# EAGLE board pi_day_2025 (EAGLE 9.6.2)
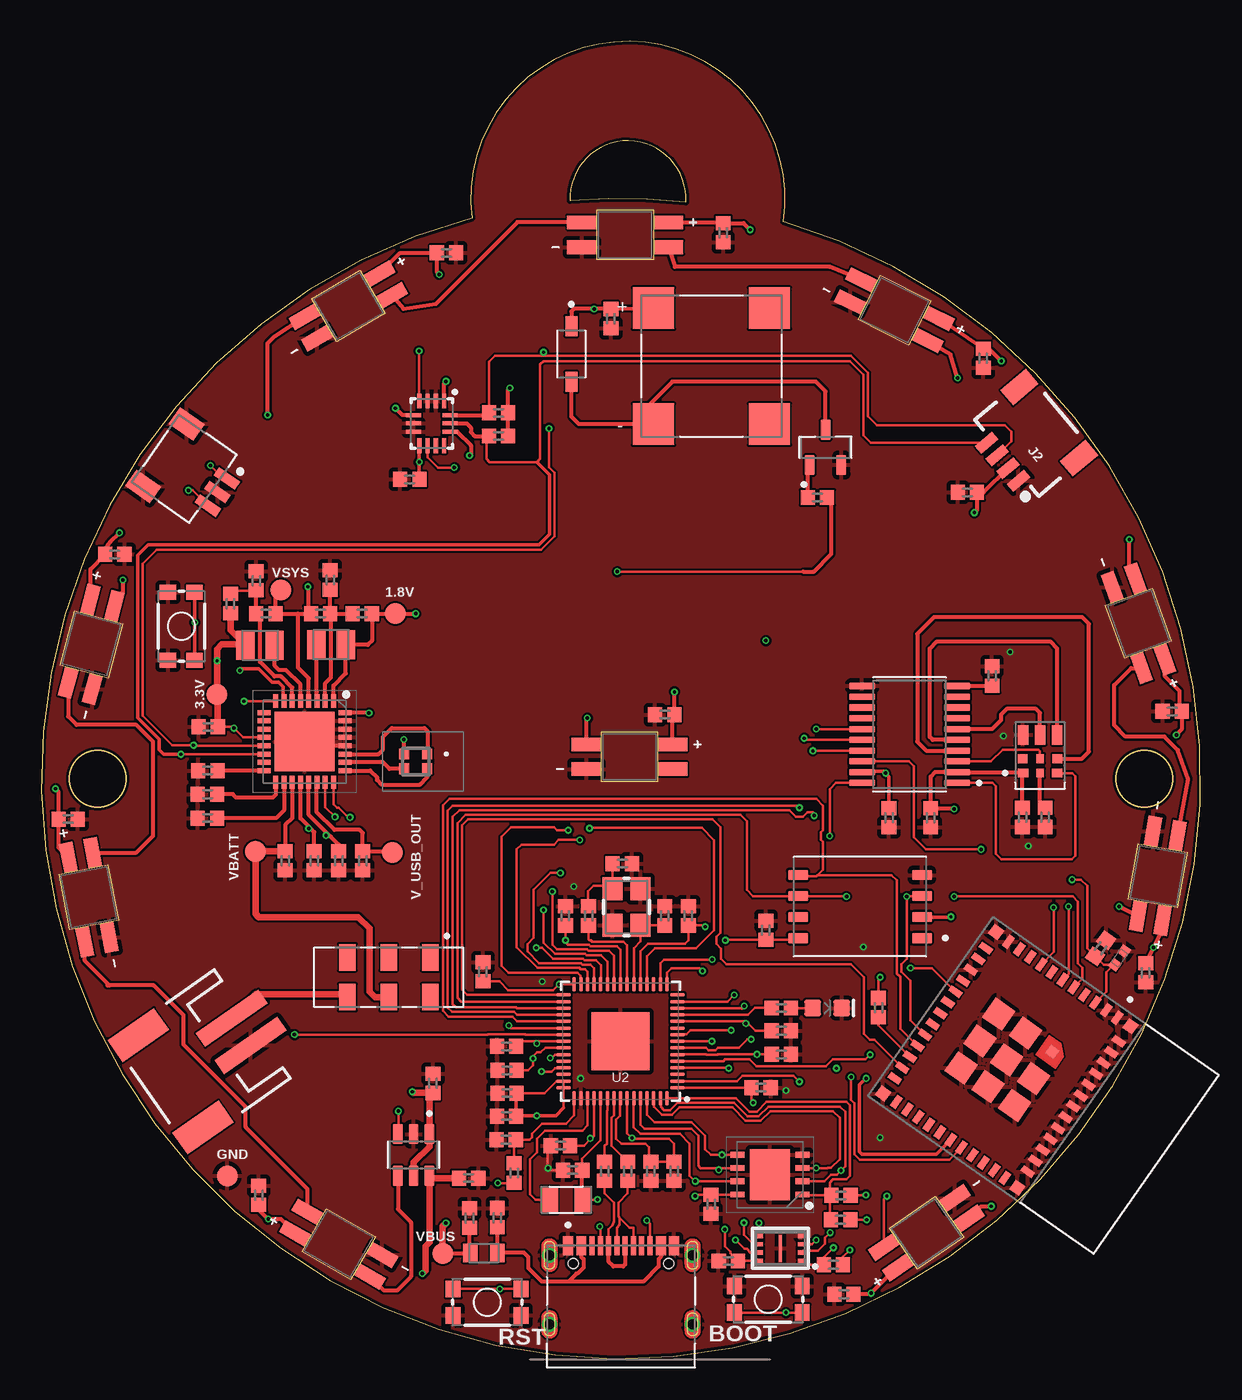
[diagram p0: board, top side]
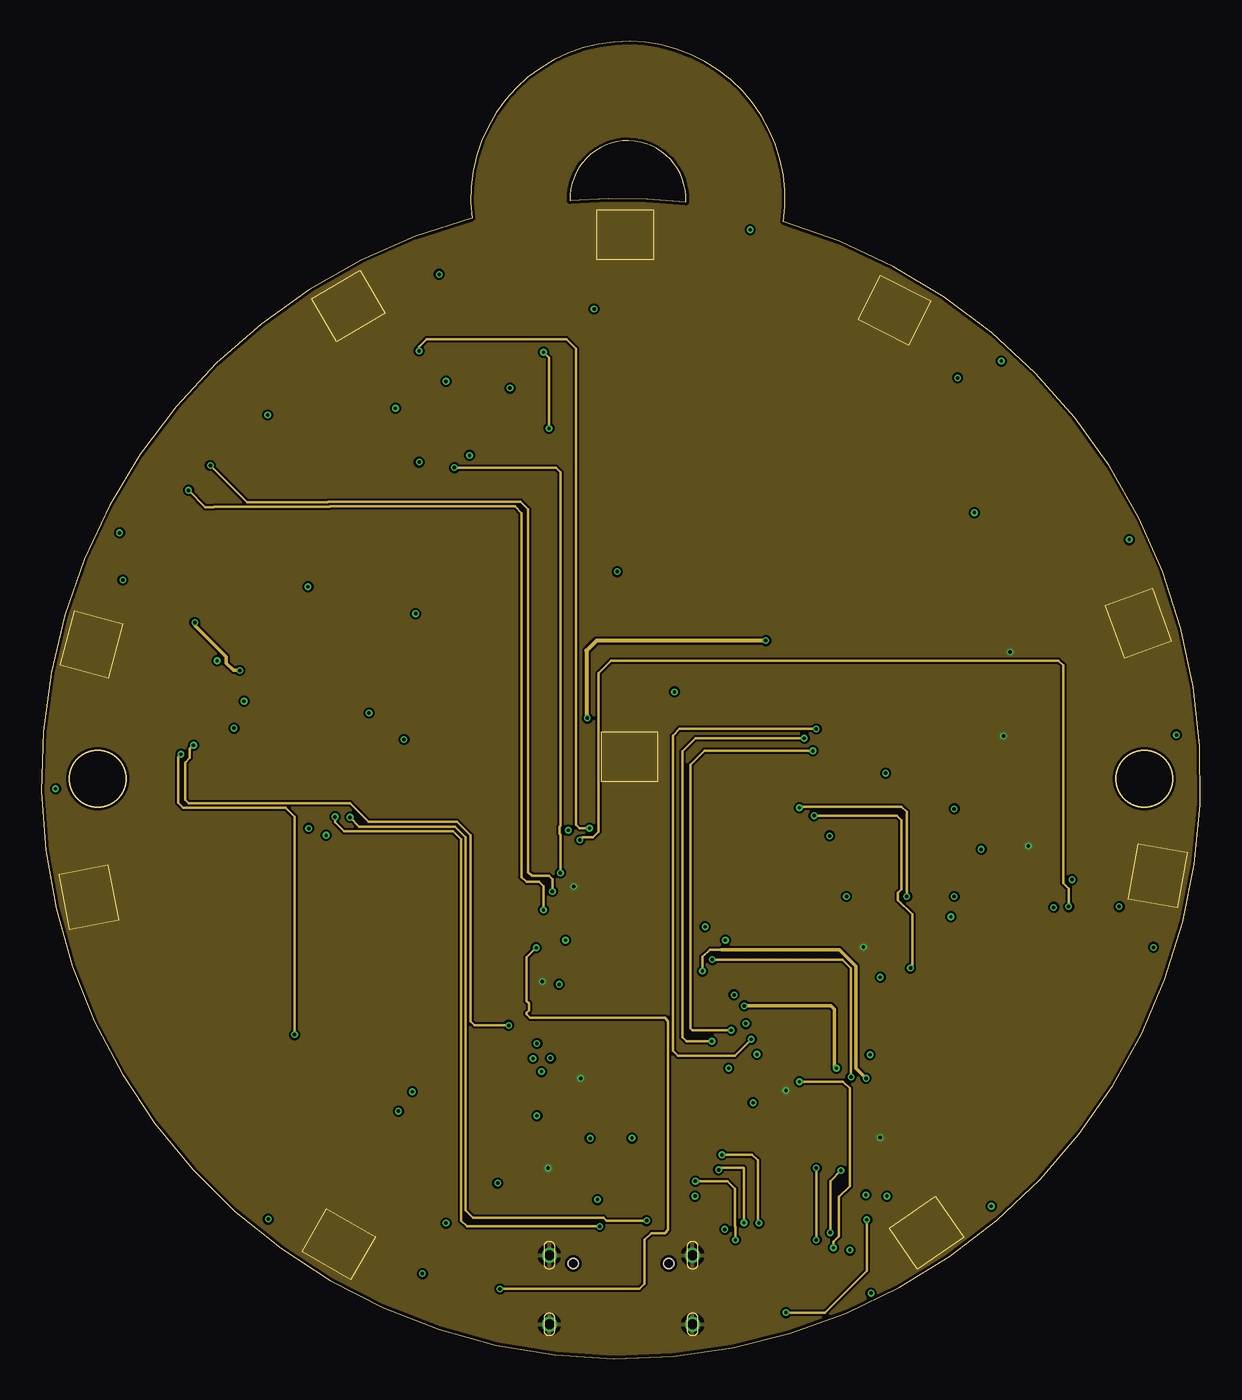
[diagram p1: board, inner layer Route2]
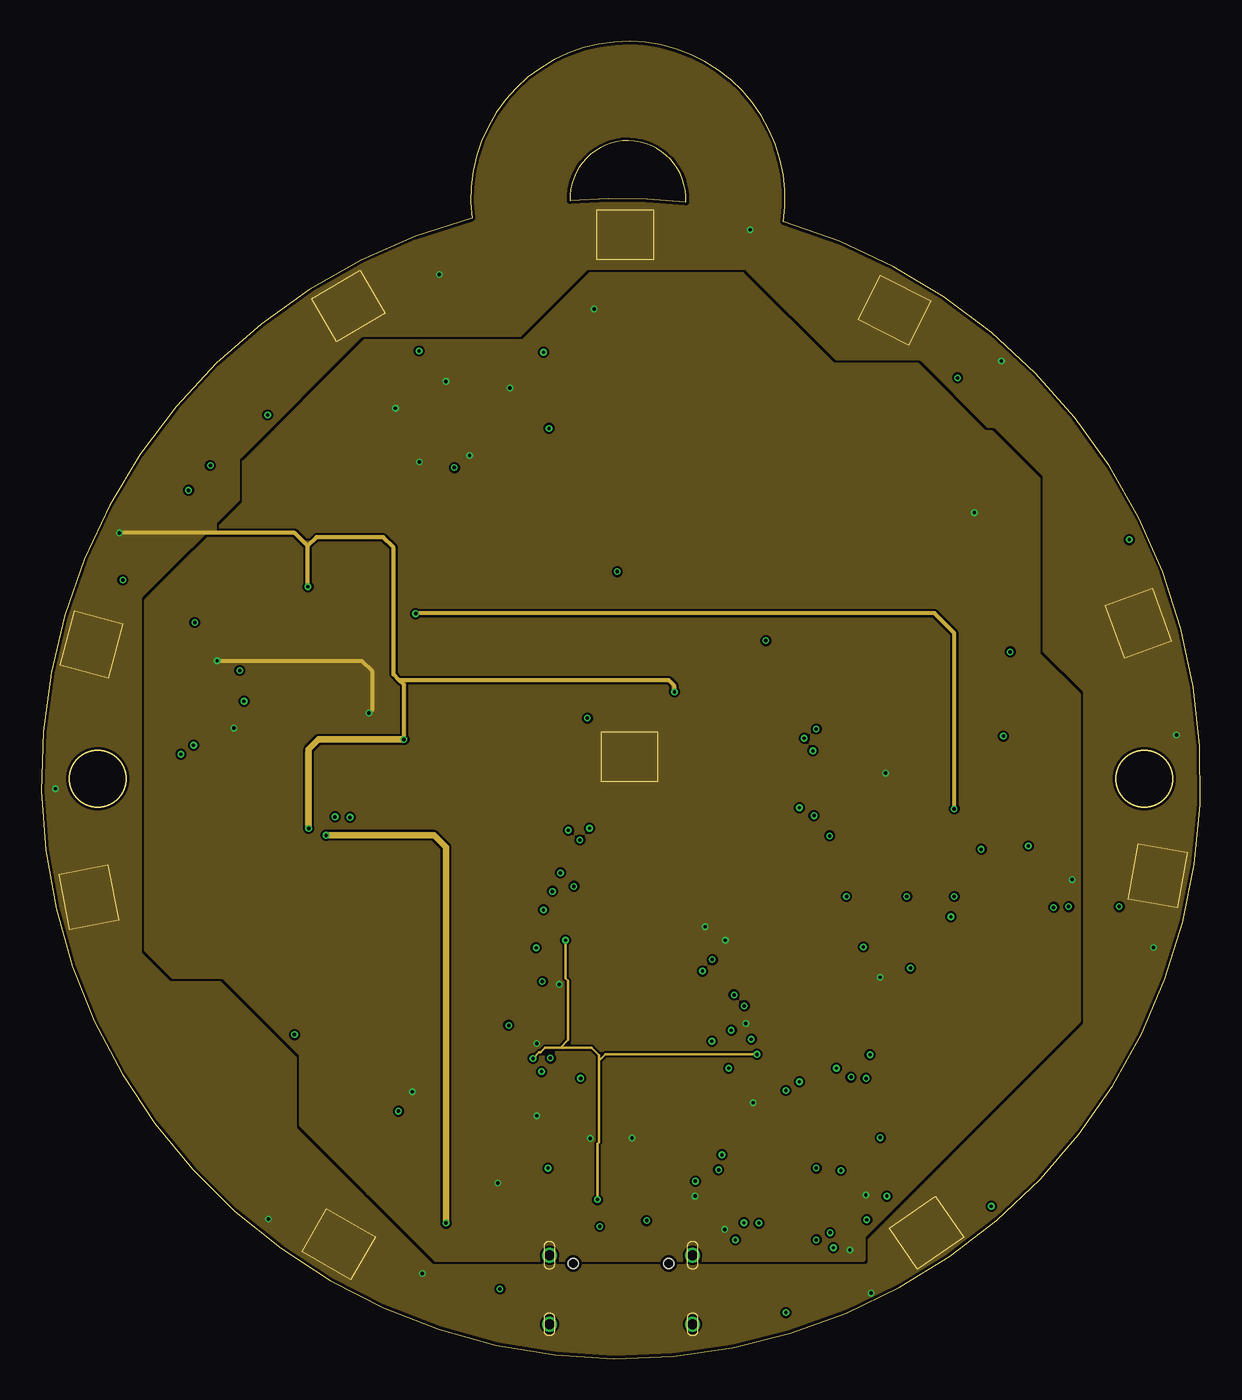
[diagram p2: board, inner layer Route15]
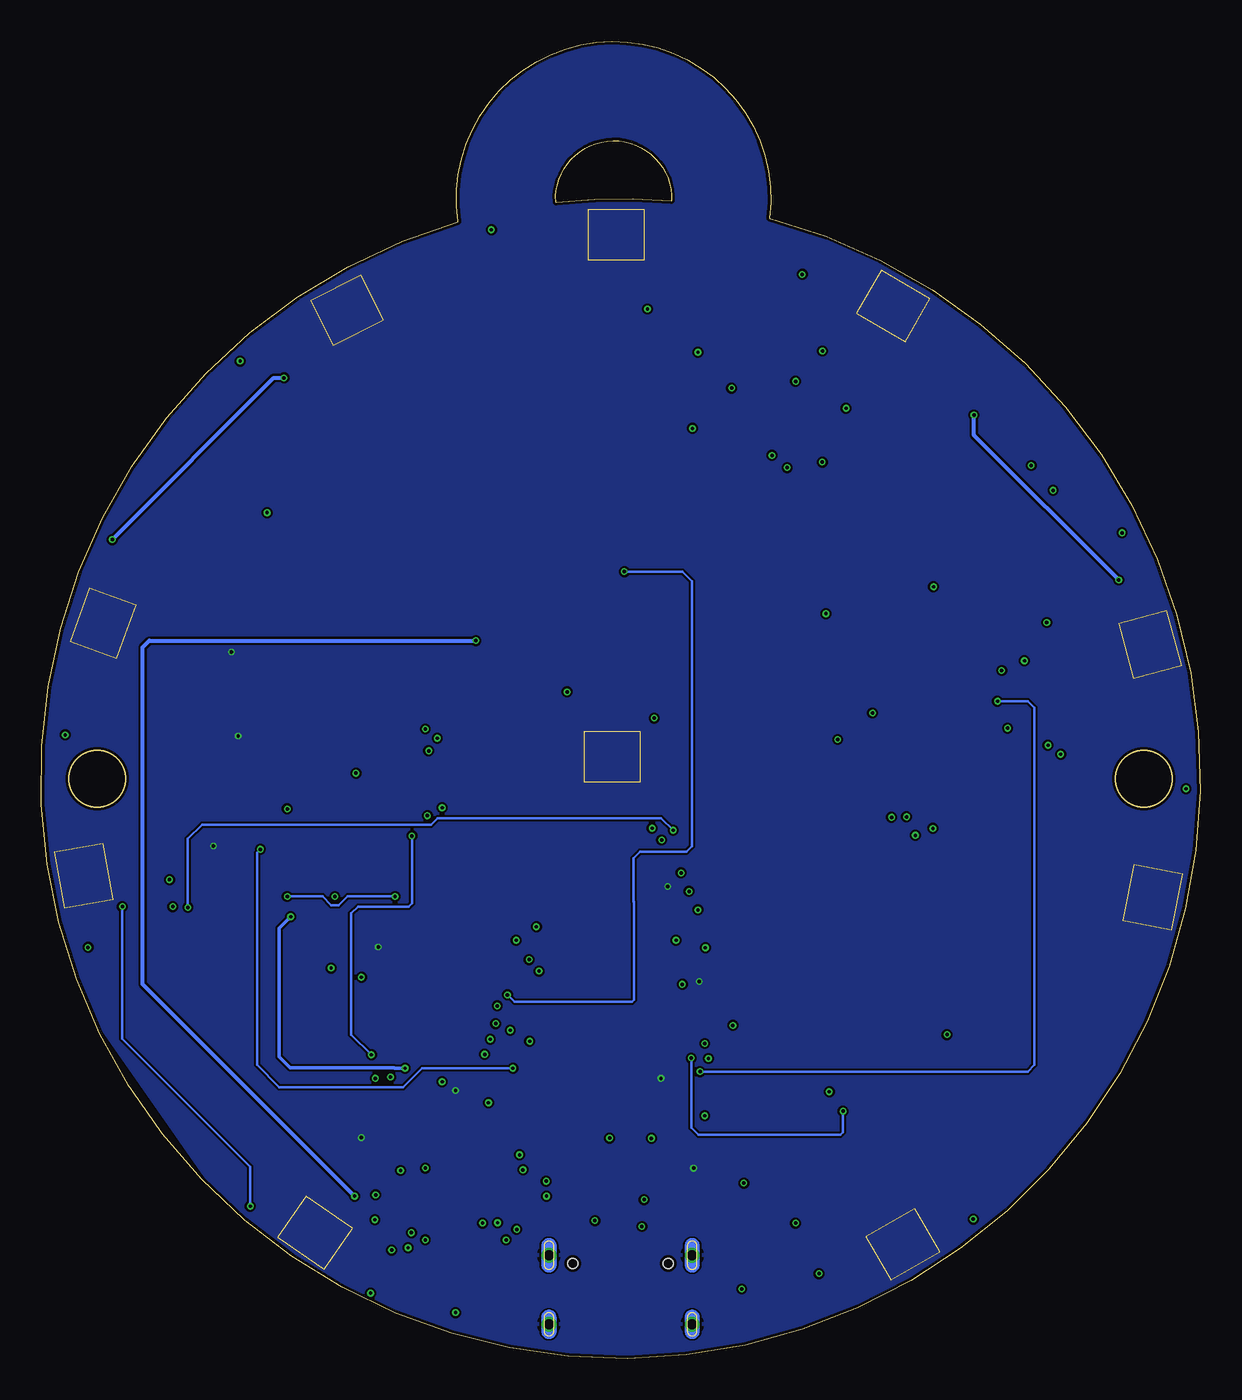
[diagram p3: board, bottom side, seen from below]

Size 69.96 x 79.49 mm. Coordinates in mm from the lower left corner, seen from the top.
Outline: 38.9,69.78 arc186 31.91,69.86 arc-11 38.9,69.78
Outline: 25.99,68.82 arc329 44.8,68.6 arc196 25.99,68.82
Outline: circle at 3.41,35 radius 1.7
Outline: circle at 66.59,35 radius 1.7
Copper layers (1+2*15+16): Top 0.035mm / dielectric 0.2mm / Route2 0.0175mm / dielectric 1.065mm / Route15 0.0175mm / dielectric 0.2mm / Bottom 0.035mm
Design rules "jlcpcb-4layers *": minimum track width 3.5mil, minimum drill 0.2mm, track to track 5mil, track to pad 0.2mm, pad to pad 5mil, via to via 0.5mm, smd to smd 5mil, copper to edge 0.2mm, drill to drill 6mil, minimum pad ring 4mil, minimum via ring 4mil, stop-mask expansion 0.05mm, vias tented up to drill 16mil, thermal gap 10mil

## Footprints (pad centres in the part's own frame; a part is rotated, then mirrored left to right if it is on the bottom)
B1,27 = smd 1.27 x 1.27: TP 0,0
0402 = smd 0.85 x 0.9: 1 -0.58,0; 2 0.58,0
0402-TIGHT = smd 0.6 x 0.6: 1 -0.5,0; 2 0.5,0
HRO_TYPE-C-31-M-12 = smd 0.6 x 1.14: A1_B12 -3.2,4.75; A4_B9 -2.4,4.75; B1_A12 3.2,4.75; B4_A9 2.4,4.75 | smd 0.3 x 1.14: A5 -1.25,4.75; A6 -0.25,4.75; A7 0.25,4.75; A8 1.25,4.75; B5 1.75,4.75; B6 0.75,4.75; B7 -0.75,4.75; B8 -1.75,4.75 | drill 0.6 pad 0.9: S1 -4.325,4.17; S2 4.325,4.17; S3 -4.325,0; S4 4.325,0 | hole 0.6: -2.89,3.68; 2.89,3.68
LED_SK6812-E = smd 1.8 x 0.82: 1 2.6,0.75; 2 2.6,-0.75; 3 -2.6,-0.75; 4 -2.6,0.75
LED-0603 = smd 1 x 1: A -0.877,0; C 0.877,0
SOD3715X145N = smd 1.21 x 0.73: A 1.68,0; C -1.68,0
SON80P400X400X50-9N = smd 0.85 x 0.35: 1 -1.95,1.2; 2 -1.95,0.4; 3 -1.95,-0.4; 4 -1.95,-1.2; 5 1.95,-1.2; 6 1.95,-0.4; 7 1.95,0.4; 8 1.95,1.2 | smd 2.4 x 3.1: 9 0,0
QFN50P500X500X90-33N = smd 0.8 x 0.3: 1 -2.45,1.75; 2 -2.45,1.25; 3 -2.45,0.75; 4 -2.45,0.25; 5 -2.45,-0.25; 6 -2.45,-0.75; 7 -2.45,-1.25; 8 -2.45,-1.75; 17 2.45,-1.75; 18 2.45,-1.25; 19 2.45,-0.75; 20 2.45,-0.25; 21 2.45,0.25; 22 2.45,0.75; 23 2.45,1.25; 24 2.45,1.75 | smd 0.3 x 0.8: 9 -1.75,-2.45; 10 -1.25,-2.45; 11 -0.75,-2.45; 12 -0.25,-2.45; 13 0.25,-2.45; 14 0.75,-2.45; 15 1.25,-2.45; 16 1.75,-2.45; 25 1.75,2.45; 26 1.25,2.45; 27 0.75,2.45; 28 0.25,2.45; 29 -0.25,2.45; 30 -0.75,2.45; 31 -1.25,2.45; 32 -1.75,2.45 | smd 3.6 x 3.6: 33 0,0
JST-2-SMD = smd 1 x 4.6: 1 -1,-3.7; 2 1,-3.7 | smd 1.6 x 3.4: NC1 -3.4,1.5; NC2 3.4,1.5
1X04_1MM_RA = smd 0.6 x 1.35: 1 -1.5,0; 2 -0.5,0; 3 0.5,0; 4 1.5,0 | smd 1.2 x 2: NC1 2.8,-3.675; NC2 -2.8,-3.675
JST_SM03B-SRSS-TB(LF)(SN) = smd 0.6 x 1.55: 1 -1,0; 2 0,0; 3 1,0 | smd 1.2 x 1.8: S1 -2.3,-3.875; S2 2.3,-3.875
INDC1608X100N = smd 0.89 x 1.11: 1 -0.814,0; 2 0.814,0
IND_LQH2MCN120K02L = smd 1 x 1.6: 1 -1,0; 2 1,0
INDC2016X100N = smd 1.1 x 1.77: 1 -0.885,0; 2 0.885,0
EAST1616RGYA0 = smd 0.6 x 0.65: 1 -0.7,-0.45; 2 0.7,-0.45; 3 -0.7,0.45; 4 0.7,0.45
XDCR_CMT-8504-100-SMT-TR = smd 2.5 x 2.5: 1 3.5,3.5; 2 3.5,-3.5; N -3.5,-3.5; P -3.5,3.5
MIC_SPK2611HM7H-1-6 = smd 0.61 x 0.534: 1 1.025,1.057; 3 -1.025,1.057 | smd 0.468 x 0.534: 2 0,1.057; 5 0,0.187 | smd 0.574 x 0.534: 4 1.043,0.187; 6 -1.043,0.187 | smd 0.61 x 1.18: 7 1.025,-1.24; 9 -1.025,-1.24 | smd 0.65 x 1.18: 8 0,-1.24
SOT95P240X111-3N = smd 1.23 x 0.6: 1 -1.06,0.95; 2 -1.06,-0.95; 3 1.06,0
TACTILE_SWITCH_SMD_4.6X2.8MM = smd 0.9 x 1: 1 -2.05,-0.8; 2 2.05,-0.8; 3 2.05,0.8; 4 -2.05,0.8
SW_JS202011JCQN = smd 1.6 x 1: 1 -1.2,2.5; 2 -1.2,0; 3 -1.2,-2.5; 5 1.2,2.5; 6 1.2,0; 7 1.2,-2.5
APS6404L-3SQR-ZR = smd 0.4 x 0.25: 1 -1.25,0.75; 2 -1.25,0.25; 3 -1.25,-0.25; 4 -1.25,-0.75; 5 1.25,-0.75; 6 1.25,-0.25; 7 1.25,0.25; 8 1.25,0.75 | smd 0.2 x 1.6: 9 0,0
RP2350A = smd 0.875 x 0.2: 1 -3.437,2.8; 2 -3.437,2.4; 3 -3.437,2; 4 -3.437,1.6; 5 -3.437,1.2; 6 -3.437,0.8; 7 -3.437,0.4; 8 -3.437,0; 9 -3.437,-0.4; 10 -3.437,-0.8; 11 -3.437,-1.2; 12 -3.437,-1.6; 13 -3.437,-2; 14 -3.437,-2.4; 15 -3.437,-2.8; 31 3.437,-2.8; 32 3.437,-2.4; 33 3.437,-2; 34 3.437,-1.6; 35 3.437,-1.2; 36 3.437,-0.8; 37 3.437,-0.4; 38 3.437,0; 39 3.437,0.4; 40 3.437,0.8; 41 3.437,1.2; 42 3.437,1.6; 43 3.437,2; 44 3.437,2.4; 45 3.437,2.8 | smd 0.2 x 0.875: 16 -2.8,-3.437; 17 -2.4,-3.437; 18 -2,-3.437; 19 -1.6,-3.437; 20 -1.2,-3.437; 21 -0.8,-3.437; 22 -0.4,-3.437; 23 0,-3.437; 24 0.4,-3.437; 25 0.8,-3.437; 26 1.2,-3.437; 27 1.6,-3.437; 28 2,-3.437; 29 2.4,-3.437; 30 2.8,-3.437; 46 2.8,3.437; 47 2.4,3.437; 48 2,3.437; 49 1.6,3.437; 50 1.2,3.437; 51 0.8,3.437; 52 0.4,3.437; 53 0,3.437; 54 -0.4,3.437; 55 -0.8,3.437; 56 -1.2,3.437; 57 -1.6,3.437; 58 -2,3.437; 59 -2.4,3.437; 60 -2.8,3.437 | smd 3.5 x 3.5: EPAD 0,0
SON127P600X800X95-8N = smd 1.21 x 0.62: 1 -3.745,1.905; 2 -3.745,0.635; 3 -3.745,-0.635; 4 -3.745,-1.905; 5 3.745,-1.905; 6 3.745,-0.635; 7 3.745,0.635; 8 3.745,1.905
SOP65P640X120-20N = smd 1.57 x 0.41: 1 -2.87,2.925; 2 -2.87,2.275; 3 -2.87,1.625; 4 -2.87,0.975; 5 -2.87,0.325; 6 -2.87,-0.325; 7 -2.87,-0.975; 8 -2.87,-1.625; 9 -2.87,-2.275; 10 -2.87,-2.925; 11 2.87,-2.925; 12 2.87,-2.275; 13 2.87,-1.625; 14 2.87,-0.975; 15 2.87,-0.325; 16 2.87,0.325; 17 2.87,0.975; 18 2.87,1.625; 19 2.87,2.275; 20 2.87,2.925
LGA-14-2.5X3MM = smd 0.9 x 0.25: 1 -1.35,0.75; 2 -1.35,0.25; 3 -1.35,-0.25; 4 -1.35,-0.75; 8 1.35,-0.75; 9 1.35,-0.25; 10 1.35,0.25; 11 1.35,0.75 | smd 0.25 x 0.9: 5 -0.5,-1.1; 6 0,-1.1; 7 0.5,-1.1; 12 0.5,1.1; 13 0,1.1; 14 -0.5,1.1
XCVR_ESP32-C3-MINI-1-N4 = smd 0.8 x 0.4: 1 -5.9,1.3; 2 -5.9,0.5; 3 -5.9,-0.3; 4 -5.9,-1.1; 5 -5.9,-1.9; 6 -5.9,-2.7; 7 -5.9,-3.5; 8 -5.9,-4.3; 9 -5.9,-5.1; 10 -5.9,-5.9; 11 -5.9,-6.7; 25 5.9,-6.7; 26 5.9,-5.9; 27 5.9,-5.1; 28 5.9,-4.3; 29 5.9,-3.5; 30 5.9,-2.7; 31 5.9,-1.9; 32 5.9,-1.1; 33 5.9,-0.3; 34 5.9,0.5; 35 5.9,1.3 | smd 0.4 x 0.8: 12 -4.8,-7.6; 13 -4,-7.6; 14 -3.2,-7.6; 15 -2.4,-7.6; 16 -1.6,-7.6; 17 -0.8,-7.6; 18 0,-7.6; 19 0.8,-7.6; 20 1.6,-7.6; 21 2.4,-7.6; 22 3.2,-7.6; 23 4,-7.6; 24 4.8,-7.6; 36 4.8,2.2; 37 4,2.2; 38 3.2,2.2; 39 2.4,2.2; 40 1.6,2.2; 41 0.8,2.2; 42 0,2.2; 43 -0.8,2.2; 44 -1.6,2.2; 45 -2.4,2.2; 46 -3.2,2.2; 47 -4,2.2; 48 -4.8,2.2 | smd 0.6 x 0.6: 49_1 -1.975,-0.725 | smd 1.45 x 1.45: 49_2 0,-0.725; 49_3 1.975,-0.725; 49_4 1.975,-2.7; 49_5 1.975,-4.675; 49_6 0,-4.675; 49_7 -1.975,-4.675; 49_8 -1.975,-2.7; 49_9 0,-2.7 | smd 0.7 x 0.7: 50 5.95,2.25; 51 5.95,-7.65; 52 -5.95,-7.65; 53 -5.95,2.25
SOT95P280X145-6N = smd 1.21 x 0.58: 1 -1.255,0.95; 2 -1.255,0; 3 -1.255,-0.95; 4 1.255,-0.95; 5 1.255,0; 6 1.255,0.95
CRYSTAL-SMD-3.2X2.5MM = smd 1.4 x 1.2: 1 -1.1,-0.85; 2 1.1,-0.85; 3 1.1,0.85; 4 -1.1,0.85

## Placement (x,y rotation side)
1.8V  TPB1,27  [B1,27]  21.38,44.95 0 top
3.3V  TPB1,27  [B1,27]  10.61,40.08 0 top
C1  0.1uF  [0402]  41.47,5.89 180 top
C2  0.1uF  [0402]  13.12,9.85 90 top
C3  0.1uF  [0402]  1.62,32.56 0 top
C4  0.1uF  [0402]  4.44,48.54 0 top
C5  0.1uF  [0402]  24.45,66.72 0 top
C6  0.1uF  [0402]  41.16,67.94 270 top
C7  0.1uF  [0402]  56.86,60.37 270 top
C8  0.1uF  [0402]  68.27,39.06 180 top
C9  0.1uF  [0402]  66.67,23.29 270 top
C10  0.1uF  [0402]  48.45,3.88 180 top
C11  0.1uF  [0402]  37.63,38.86 180 top
C12  0.1uF  [0402]  27.52,8.51 90 top
C13  0.1uF  [0402]  25.85,8.48 90 top
C14  1.0uF  [0402]  17.95,30.04 270 top
C15  1.0uF  [0402]  19.4,30.04 270 top
C16  0.1uF  [0402]  10.07,38.12 0 top
C17  0.1uF  [0402]  40.43,9.32 270 top
C18  0.1uF  [0402]  26.66,23.34 90 top
C19  0.1uF  [0402]  22.24,53.06 180 top
C20  2.2UF  [0402]  14.72,30.04 270 top
C21  10uF  [0402]  16.48,30.04 270 top
C22  10uF  [0402]  13.55,44.95 180 top
C23  10uF  [0402]  16.86,44.95 0 top
C24  10uF  [0402]  19.37,44.95 180 top
C25  10uF  [0402]  11.42,45.56 90 top
C26  0.1uF  [0402]  55.9,52.27 180 top
C27  0.1uF  [0402]  28.08,18.84 180 top
C28  0.1uF  [0402]  39.06,26.72 90 top
C29  0.1uF  [0402]  43.45,16.35 0 top
C30  0.1uF  [0402]  44.67,19.78 0 top
C31  0.1uF  [0402]  36.8,11.3 270 top
C32  0.1uF  [0402]  28.11,16.02 180 top
C33  0.1uF  [0402]  38.19,11.3 270 top
C34  0.1uF  [0402]  28.08,14.63 180 top
C35  4.7uF  [0402]  28.06,13.2 180 top
C36  4.7uF  [0402]  32.07,11.38 180 top
C37  4.7uF  [0402]  31.33,12.85 180 top
C38  0.1uF  [0402]  44.67,18.36 0 top
C39  4.7uF  [0402]  31.64,26.72 90 top
C40  0.1uF  [0402]  28.11,17.4 180 top
C41  15pF  [0402]  35.07,29.87 0 top
C42  15pF  [0402]  37.63,26.72 90 top
C43  1.0uF  [0402]  59.22,32.66 270 top
C44  1.0uF  [0402]  60.59,32.66 270 top
C45  0.1uF  [0402]  53.69,32.64 90 top
C46  0.1uF  [0402]  51.17,32.64 270 top
C47  10uF  [0402-TIGHT]  65.09,24.18 55 top
C48  0.1uF  [0402]  63.95,24.76 55 top
C49  0.1uF  [0402]  23.64,16.61 270 top
C50  0.1uF  [0402]  25.8,10.89 0 top
C51  0.1uF  [0402]  43.73,25.85 270 top
C52  0.1uF  [0402]  34.38,62.76 270 top
CONN1  TYPE-C-31-M-12  [HRO_TYPE-C-31-M-12]  34.99,2.07 0 top
D1  SK6812-EJ  [LED_SK6812-E]  17.95,6.91 150 top
D2  SK6812-EJ  [LED_SK6812-E]  2.86,27.83 101 top
D3  SK6812-EJ  [LED_SK6812-E]  3.01,43.1 75 top
D4  SK6812-EJ  [LED_SK6812-E]  18.53,63.52 30 top
D5  SK6812-EJ  [LED_SK6812-E]  35.25,67.81 0 top
D6  SK6812-EJ  [LED_SK6812-E]  51.5,63.27 333.5 top
D7  SK6812-EJ  [LED_SK6812-E]  66.23,44.37 290 top
D8  SK6812-EJ  [LED_SK6812-E]  67.4,29.13 260 top
D9  SK6812-EJ  [LED_SK6812-E]  53.43,7.59 214.7 top
D10  SK6812-EJ  [LED_SK6812-E]  35.5,36.32 0 top
D11  BLUE  [LED-0603]  47.44,21.15 0 top
D12  1N5819HW-7  [SOD3715X145N]  31.99,60.63 270 top
GND  TPB1,27  [B1,27]  11.22,11.02 0 top
IC1  W25Q64JVXGIQ  [SON80P400X400X50-9N]  43.98,11.1 180 top
IC2  NPM1300-QEAA-R  [QFN50P500X500X90-33N]  15.89,37.23 270 top
J1  JST-PH=2  [JST-2-SMD]  9.03,17.6 125 top
J2  Qwiic  [1X04_1MM_RA]  58.03,54.12 130 top
J4  SM03B-SRSS-TB(LF)(SN)  [JST_SM03B-SRSS-TB(LF)(SN)]  10.63,52.3 235 top
L1  2.2nH  [INDC1608X100N]  26.71,6.37 180 top
L2  3.3uH  [IND_LQH2MCN120K02L]  31.69,9.57 180 top
L3  2.2uH  [INDC2016X100N]  17.49,43.07 0 top
L4  2.2uH  [INDC2016X100N]  13.2,43.05 180 top
LED1  EAST1616RGYA0  [EAST1616RGYA0]  22.6,36.04 180 top
LS1  MLT-5020  [XDCR_CMT-8504-100-SMT-TR]  40.45,59.89 0 top
MK1  SPK2611HM7H-1-6  [MIC_SPK2611HM7H-1-6]  60.29,36.39 180 top
Q2  BSS138  [SOT95P240X111-3N]  47.34,54.99 90 top
R1  10k  [0402]  47.82,5.66 180 top
R2  100OHM  [0402]  44.67,21.15 0 top
R3  10k  [0402]  10.02,32.61 180 top
R4  DNF  [0402]  48.28,9.85 0 top
R5  1K  [0402]  48.25,8.38 0 top
R6  2.2K  [0402]  27.6,57.07 0 top
R7  2.2K  [0402]  27.6,55.67 0 top
R9  47K  [0402]  10.02,34.06 0 top
R10  470K  [0402]  10.05,35.48 0 top
R11  33  [0402]  28.54,11.2 90 top
R12  27  [0402]  35.4,11.3 90 top
R13  27  [0402]  34,11.3 90 top
R14  0  [0402]  12.97,46.94 270 top
R15  1K  [0402]  33.04,26.72 270 top
R16  0  [0402]  17.44,46.99 270 top
R22  100K  [0402]  57.39,41.2 270 top
R23  10k  [0402]  50.54,21.18 90 top
R25  10k  [0402]  46.85,51.96 0 top
S1  MOMENTARY-SWITCH-SPST-SMD-4.6X2.8MM  [TACTILE_SWITCH_SMD_4.6X2.8MM]  43.88,3.58 0 top
S2  MOMENTARY-SWITCH-SPST-SMD-4.6X2.8MM  [TACTILE_SWITCH_SMD_4.6X2.8MM]  26.91,3.4 180 top
S3  JS202011JCQN  [SW_JS202011JCQN]  20.97,23.01 270 top
S4  MOMENTARY-SWITCH-SPST-SMD-4.6X2.8MM  [TACTILE_SWITCH_SMD_4.6X2.8MM]  8.45,44.19 270 top
U1  APS6404L-3SQR-ZR  [APS6404L-3SQR-ZR]  44.62,6.65 180 top
U2  RP2350A  [RP2350A]  34.97,19.15 180 top
U3  XTSD04GLGEAG  [SON127P600X800X95-8N]  49.42,27.28 180 top
U5  TXS0108EPWRG4  [SOP65P640X120-20N]  52.42,37.66 180 top
U6  LSM6DS3TR-C  [LGA-14-2.5X3MM]  23.56,56.44 270 top
U9  ESP32-C3-MINI-1-N4  [XCVR_ESP32-C3-MINI-1-N4]  60.49,16.48 235 top
U15  SN74LVC1T45DBVRG4  [SOT95P280X145-6N]  22.47,12.29 270 top
V_USB_OUT  TPB1,27  [B1,27]  21.17,30.53 0 top
VBATT  TPB1,27  [B1,27]  12.92,30.6 0 top
VBUS  TPB1,27  [B1,27]  24.22,6.35 0 top
VSYS  TPB1,27  [B1,27]  14.47,46.38 0 top
Y1  12MHz  [CRYSTAL-SMD-3.2X2.5MM]  35.32,27.25 90 top

## Library data of the parts
1.8V 3.3V GND V_USB_OUT VBATT VBUS VSYS = testpad
C1 C17-C19 C26-C34 C38 C40 C51 = SparkFun-Capacitors_Sai; PROD_ID: CAP-14993
C2-C11 = SparkFun-Capacitors; PROD_ID: CAP-15083
C12 C13 C16 = SparkFun-Capacitors; PROD_ID: CAP-12416
C14 C15 C43 C44 = SparkFun-Capacitors; PROD_ID: CAP-12417
C20-C25 C35-C37 C39 = SparkFun-Capacitors_Sai
C41 C42 = SparkFun-Capacitors; PROD_ID: CAP-13063
C45 C46 C48-C50 C52 = SparkFun-Capacitors; PROD_ID: CAP-14993
C47 = SparkFun-Capacitors; PROD_ID: CAP-14848
CONN1 = TYPE-C-31-M-12; AVAILABILITY: Not in stock; CHECK_PRICES: https://www.snapeda.com/parts/TYPE-C-31-M-12/HRO+Electronics+Co.%252C+Ltd./view-part/?ref=eda; DESCRIPTION: USB Connectors 24 Receptacle 1 8.94*7.3mm RoHS; MF: HRO Electronics Co., Ltd.; MP: TYPE-C-31-M-12; PACKAGE: Package; PRICE: None; SNAPEDA_LINK: https://www.snapeda.com/parts/TYPE-C-31-M-12/HRO+Electronics+Co.%252C+Ltd./view-part/?ref=snap
D1-D10 = SK6812-E; AVAILABILITY: Not in stock; CHECK_PRICES: https://www.snapeda.com/parts/SK6812-E/DONGGUANG+OPSCO+OPTOELECTRONICS+CO.%252C+LTD/view-part/?ref=eda; DESCRIPTION: SK6812MINI-E is a smart LED control circuit and light emitting circuit in one controlled LED source, which has the shape of a 3528 LED chip.; MF: DONGGUANG OPSCO OPTOELECTRONICS CO., LTD; MP: SK6812-E; PACKAGE: Package; PRICE: None; SNAPEDA_LINK: https://www.snapeda.com/parts/SK6812-E/DONGGUANG+OPSCO+OPTOELECTRONICS+CO.%252C+LTD/view-part/?ref=snap
D11 = SparkFun-LED; PROD_ID: DIO-08575
D12 = 1N5819HW-7; AVAILABILITY: In Stock; CHECK_PRICES: https://www.snapeda.com/parts/1N5819HW-7/Diodes+Inc./view-part/?ref=eda; DESCRIPTION: Diode Schottky 40 V 1A Surface Mount SOD-123; MF: Diodes Inc.; MP: 1N5819HW-7; PACKAGE: SOD-123 Fairchild Semiconductor; PRICE: None; PURCHASE-URL: https://www.snapeda.com/api/url_track_click_mouser/?unipart_id=51510&manufacturer=Diodes Inc.&part_name=1N5819HW-7&search_term=1n5819hw-7; SNAPEDA_LINK: https://www.snapeda.com/parts/1N5819HW-7/Diodes+Inc./view-part/?ref=snap
IC1 = SamacSys_Parts; DESCRIPTION: 64M-bit Serial Flash Memory with uniform 4KB sectors and Dual/Quad SPI; HEIGHT: 0.5mm; MANUFACTURER_NAME: Winbond; MANUFACTURER_PART_NUMBER: W25Q64JVXGIQ
IC2 = SamacSys_Parts; ARROW_PART_NUMBER: NPM1300-QEAA-R; ARROW_PRICE-STOCK: https://www.arrow.com/en/products/npm1300-qeaa-r/nordic-semiconductor?region=nac; DESCRIPTION: Power Management IC (PMIC) with battery charging, accurate fuel gauging and advanced system management features.; HEIGHT: 0.9mm; MANUFACTURER_NAME: Nordic Semiconductor; MANUFACTURER_PART_NUMBER: NPM1300-QEAA-R; MOUSER_PART_NUMBER: 949-NPM1300-QEAA-R; MOUSER_PRICE-STOCK: https://www.mouser.co.uk/ProductDetail/Nordic-Semiconductor/nPM1300-QEAA-R?qs=3pZoU%2F6IRTiFavqFmjPoaw%3D%3D
J1 = SparkFun-Connectors; PROD_ID: CONN-11443; SF_ID: PRT-08612
J2 = SparkFun-Connectors; PROD_ID: CONN-13694
J4 = SM03B-SRSS-TB_LF__SN_; AVAILABILITY: In Stock; CHECK_PRICES: https://www.snapeda.com/parts/SM03B-SRSS-TB(LF)(SN)/JST+Sales+America+Inc./view-part/?ref=eda; DESCRIPTION: Connector Header Surface Mount, Right Angle 3 position 0.039 (1.00mm); MF: JST Sales America Inc.; MP: SM03B-SRSS-TB(LF)(SN); PACKAGE: None; PRICE: None; SNAPEDA_LINK: https://www.snapeda.com/parts/SM03B-SRSS-TB(LF)(SN)/JST+Sales+America+Inc./view-part/?ref=snap
L1 = LQW18AN2N2D10D; AVAILABILITY: In Stock; CHECK_PRICES: https://www.snapeda.com/parts/LQW18AN2N2D10D/Murata/view-part/?ref=eda; DESCRIPTION: Inductor with Inductance: 2.2nH Tol. +/-0.5nH, Package: 0603 (1608); MF: Murata; MP: LQW18AN2N2D10D; PACKAGE: 1608 Murata; PRICE: None; PURCHASE-URL: https://www.snapeda.com/api/url_track_click_mouser/?unipart_id=1503005&manufacturer=Murata&part_name=LQW18AN2N2D10D&search_term=2.2nh 0603; SNAPEDA_LINK: https://www.snapeda.com/parts/LQW18AN2N2D10D/Murata/view-part/?ref=snap
L2 = LQH2MCN120K02L; AVAILABILITY: In Stock; CHECK_PRICES: https://www.snapeda.com/parts/LQH2MCN120K02L/Murata/view-part/?ref=eda; DESCRIPTION: Inductor with Inductance: 12uH Tol. +/-10%, Package: 0806 (2016); MF: Murata; MP: LQH2MCN120K02L; PACKAGE: NONSTANDARD; PRICE: None; SNAPEDA_LINK: https://www.snapeda.com/parts/LQH2MCN120K02L/Murata/view-part/?ref=snap
L3 L4 = LQM2MPN4R7MG0L; AVAILABILITY: In Stock; CHECK_PRICES: https://www.snapeda.com/parts/LQM2MPN4R7MG0L/Murata/view-part/?ref=eda; DESCRIPTION: Inductor with Inductance: 4.7uH Tol. +/-20%, Package: 0806 (2016); MF: Murata; MP: LQM2MPN4R7MG0L; PACKAGE: 2016 Murata; PRICE: None; SNAPEDA_LINK: https://www.snapeda.com/parts/LQM2MPN4R7MG0L/Murata/view-part/?ref=snap
LED1 = EAST1616RGYA0; DESCRIPTION: EAST1616RGYA0; HEIGHT: 0.35mm; MANUFACTURER_NAME: Everlight; MANUFACTURER_PART_NUMBER: EAST1616RGYA0; MOUSER_PART_NUMBER: 638-EAST1616RGYA0; MOUSER_PRICE-STOCK: https://www.mouser.co.uk/ProductDetail/Everlight/EAST1616RGYA0?qs=byeeYqUIh0NXGTsl%2FWCRrQ%3D%3D
LS1 = CMT-8504-100-SMT-TR; MANUFACTURER: CUI Inc.; MAXIMUM_PACKAGE_HEIGHT: 4.00mm; PARTREV: 1.0; STANDARD: Manufacturer Recommendations
MK1 = SPK2611HM7H-1-6; CHECK_PRICES: https://www.snapeda.com/parts/SPK2611HM7H-1-6/Knowles/view-part/?ref=eda; DESCRIPTION: Digital, PDM Microphone MEMS (Silicon) 1.71 V ~ 1.98 V Omnidirectional () Solder Pads; MF: Knowles; MP: SPK2611HM7H-1-6; PACKAGE: Knowles; SNAPEDA_LINK: https://www.snapeda.com/parts/SPK2611HM7H-1-6/Knowles/view-part/?ref=snap
Q2 = BSS138; AVAILABILITY: In Stock; CHECK_PRICES: https://www.snapeda.com/parts/BSS138/Onsemi/view-part/?ref=eda; DESCRIPTION: N-Channel 50 V 220mA (Ta) 350mW (Ta) Surface Mount SOT-23-3; MF: onsemi; MP: BSS138; PACKAGE: SOT-23-3 ON Semiconductor; PRICE: None; SNAPEDA_LINK: https://www.snapeda.com/parts/BSS138/Onsemi/view-part/?ref=snap
R1 R3 R23 R25 = SparkFun-Resistors; PROD_ID: RES-14241
R2 R9 R12 R13 = SparkFun-Resistors_Sai
R4-R7 R10 = SparkFun-Resistors
R11 = SparkFun-Resistors; PROD_ID: RES-14883
R14 R16 = SparkFun-Resistors_Sai; PROD_ID: RES-14244
R15 = SparkFun-Resistors; PROD_ID: RES-14342
R22 = SparkFun-Resistors; PROD_ID: RES-13495
S1 S2 S4 = SparkFun-Switches; PROD_ID: SWCH-15606
S3 = JS202011JCQN; AVAILABILITY: In Stock; CHECK_PRICES: https://www.snapeda.com/parts/JS202011JCQN/C%2526K/view-part/?ref=eda; DESCRIPTION: Slide Switch DPDT Surface Mount; MF: C&K; MP: JS202011JCQN; PACKAGE: DPDT-6 C&amp;K; PRICE: None; SNAPEDA_LINK: https://www.snapeda.com/parts/JS202011JCQN/C%2526K/view-part/?ref=snap
U1 = RP2350A; PROD_ID: IC-21870
U2 = RP2350A; PROD_ID: IC-21276
U3 = XTSD04GLGEAG; AVAILABILITY: Not in stock; CHECK_PRICES: https://www.snapeda.com/parts/XTSD04GLGEAG/XTX/view-part/?ref=eda; DESCRIPTION: Flash Memory Card 4Gbit 2.7V to 3.6V SD Card 8-Pin LGA; MF: XTX; MP: XTSD04GLGEAG; PACKAGE: Package; PRICE: None; SNAPEDA_LINK: https://www.snapeda.com/parts/XTSD04GLGEAG/XTX/view-part/?ref=snap
U5 = TXS0108EPWRG4; CHECK_PRICES: https://www.snapeda.com/parts/TXS0108EPWRG4/Texas+Instruments/view-part/?ref=eda; DESCRIPTION: 8-bit bidirectional voltage-level shifter for open-drain and push-pull application 20-TSSOP -40 to 85; DIGIKEY_PART_NUMBER: 296-46258-2-ND; MF: Texas Instruments; MP: TXS0108EPWRG4; PACKAGE: TSSOP-20 Texas Instruments; SNAPEDA_LINK: https://www.snapeda.com/parts/TXS0108EPWRG4/Texas+Instruments/view-part/?ref=snap
U6 = LSM6DS3TR-C; AVAILABILITY: In Stock; CHECK_PRICES: https://www.snapeda.com/parts/LSM6DS3TR-C/STMicroelectronics/view-part/?ref=eda; DESCRIPTION: IMUs - Inertial Measurement Units iNEMO 6DoF inertial module, for entry level / mid-tier smart phones and Portable PC platforms; MF: STMicroelectronics; MP: LSM6DS3TR-C; PACKAGE: None; PRICE: None; SNAPEDA_LINK: https://www.snapeda.com/parts/LSM6DS3TR-C/STMicroelectronics/view-part/?ref=snap
U9 = ESP32-C3-MINI-1-N4; AVAILABILITY: In Stock; DESCRIPTION: Bluetooth, WiFi 802.11b/g/n, Bluetooth v5.0 Transceiver Module 2.412GHz ~ 2.484GHz PCB Trace Surface Mount; MF: Espressif Systems; MP: ESP32-C3-MINI-1-N4; PACKAGE: SMD-53 Espressif Systems; PRICE: None; PURCHASE-URL: https://pricing.snapeda.com/search/part/ESP32-C3-MINI-1-N4/?ref=eda
U15 = SN74LVC1T45DBVRG4; AVAILABILITY: In Stock; CHECK_PRICES: https://www.snapeda.com/parts/SN74LVC1T45DBVRG4/Texas+Instruments/view-part/?ref=eda; DESCRIPTION: Single-Bit Dual-Supply Bus Transceiver with Configurable Voltage-Level Shifting and 3-State Outputs 6-SOT-23 -40 to 85; MF: Texas Instruments; MP: SN74LVC1T45DBVRG4; PACKAGE: SOT-23-6 Texas Instruments; PRICE: None; SNAPEDA_LINK: https://www.snapeda.com/parts/SN74LVC1T45DBVRG4/Texas+Instruments/view-part/?ref=snap
Y1 = SparkFun-Clocks; PROD_ID: XTAL-13518

## Nets
1.1V: C36.1 C38.1 C39.1 C40.1 L2.1 U2.6 U2.23 U2.39 U2.50
1.8V: 1.8V.TP C24.1 C43.1 C45.2 IC2.1 L3.2 MK1.1 U5.2
3.3V: 3.3V.TP C1.1 C16.2 C17.1 C18.1 C19.1 C25.1 C26.1 C27.1 C28.1 C29.1 C30.1 C31.1 C32.1 C33.1 C34.1 C37.1 C46.1 C47.1 C48.1 C49.2 C51.2 C52.1 D12.C IC1.8 IC2.12 IC2.32 J2.2 L4.2 LS1.P R1.1 R4.2 R6.2 R7.2 R11.1 R23.2 U1.8 U2.1 U2.11 U2.20 U2.30 U2.38 U2.44 U2.45 U2.49 U2.53 U2.54 U3.8 U5.19 U6.1 U6.5 U6.8 U6.12 U9.3 U15.1 U15.5
!BOOT: R5.2 S1.1 S1.2
!ESP32_BOOT: U2.31 U9.23
!ESP32_RST: U2.29 U9.8
!FLASH_CS: R1.2 U1.1 U2.2
!INT_NPM1300: IC2.8 U2.42
!MEM_CS: U2.13 U3.2
!QSPI_CS: IC1.1 R4.1 R5.1 U2.60
!RESET: S2.1 S2.2 U2.26
!RESET_NPM1300: IC2.7 S4.3 S4.4
BUZZER_DRIVER: R25.2 U2.14
ESP32_CS: U2.33 U9.16
ESP32_HANDSHAKE: U2.28 U9.6
ESP32_MISO: U2.32 U3.6 U9.5
ESP32_MOSI: U2.35 U3.5 U9.21
ESP32_RX: U2.16 U9.30
ESP32_SCK: U2.34 U3.3 U9.20
ESP32_TX: U2.17 U9.31
GND: C1.2 C2.2 C3.2 C4.2 C5.2 C6.2 C7.2 C8.2 C9.2 C10.2 C11.2 C12.2 C13.2 C14.2 C15.2 C16.1 C17.2 C18.2 C19.2 C20.2 C21.2 C26.2 C27.2 C28.2 C29.2 C30.2 C31.2 C32.2 C33.2 C34.2 C35.2 C36.2 C37.2 C38.2 C39.2 C40.2 C41.2 C42.2 C43.2 C44.2 C45.1 C46.2 C47.2 C48.2 C49.1 C50.2 C51.1 C52.2 CONN1.A1_B12 CONN1.B1_A12 CONN1.S1 CONN1.S2 CONN1.S3 CONN1.S4 D1.3 D2.3 D3.3 D4.3 D5.3 D6.3 D7.3 D8.3 D9.3 D10.3 D11.C GND.TP IC1.4 IC1.9 IC2.28 IC2.29 IC2.30 IC2.31 IC2.33 J1.1 J2.1 J4.2 J4.S1 J4.S2 MK1.7 Q2.2 R3.2 R9.1 R10.1 R14.1 R16.1 R22.1 S1.3 S1.4 S2.3 S2.4 S4.1 S4.2 U1.4 U1.9 U2.47 U2.EPAD U3.4 U5.11 U6.2 U6.3 U6.6 U6.7 U9.1 U9.2 U9.11 U9.14 U9.36 U9.37 U9.38 U9.39 U9.40 U9.41 U9.42 U9.43 U9.44 U9.45 U9.46 U9.47 U9.48 U9.49_1 U9.49_2 U9.49_3 U9.49_4 U9.49_5 U9.49_6 U9.49_7 U9.49_8 U9.49_9 U9.50 U9.51 U9.52 U9.53 U15.2 Y1.2 Y1.4
IA611_IRQ: U2.9 U5.17
IA611_IRQ_LP: MK1.6 U5.4
LED0: IC2.25 LED1.3
LED1: IC2.26 LED1.4
LED2: IC2.27 LED1.1
LSM6_INT1: U2.19 U6.4
LSM6_INT2: U2.27 U6.9
N$1: R2.1 U2.12
N$2: C35.1 R11.2 U2.46
N$3: IC2.18 R3.1
N$4: D11.A R2.2
N$5: L2.2 U2.48
N$6: IC2.16 R10.2
N$7: IC2.17 R9.2
N$9: J1.2 S3.7
N$10: IC2.3 L3.1
N$11: C41.1 R15.1 Y1.3
N$12: C42.1 U2.21 Y1.1
N$13: R15.2 U2.22
N$14: IC2.5 L4.1
N$23: C44.1 MK1.2
N$24: R22.2 U5.10
N$25: R23.1 U9.22
N$26: D12.A LS1.N Q2.3
N$27: Q2.1 R25.1
NPXL_1_IN: D1.4 U15.4
NPXL_1_OUT: D1.2 D2.4
NPXL_2_OUT: D2.2 D3.4
NPXL_3.3V: U2.40 U15.3
NPXL_3_OUT: D3.2 D4.4
NPXL_4_OUT: D4.2 D5.4
NPXL_5_OUT: D5.2 D6.4
NPXL_6_OUT: D6.2 D7.4
NPXL_7_OUT: D7.2 D8.4
NPXL_8_OUT: D8.2 D9.4
NPXL_9_OUT: D9.2 D10.4
PDM_CLK: U2.5 U5.20
PDM_CLK_LP: MK1.3 U5.1
PDM_SDO: U2.4 U5.18
PDM_SDO_LP: MK1.5 U5.3
PVSS1: C23.2 C24.2 IC2.2 R16.2
PVSS2: C22.2 C25.2 IC2.6 R14.2
QSPI_CLK: IC1.6 U1.6 U2.56
SCL: IC2.14 J2.4 R7.1 U2.37 U6.13
SDA: IC2.13 J2.3 R6.1 U2.36 U6.14
SIO0: IC1.5 U1.5 U2.57
SIO1: IC1.2 U1.2 U2.59
SIO2: IC1.3 U1.3 U2.58
SIO3: IC1.7 U1.7 U2.55
SWCLK: J4.1 U2.24
SWDIO: J4.3 U2.25
U_N: R13.2 U2.51
U_P: R12.2 U2.52
UART_RX: U2.7 U5.15
UART_RX_LP: MK1.8 U5.6
UART_TX: U2.8 U5.16
UART_TX_LP: MK1.9 U5.5
USB_CC1: CONN1.A5 IC2.23
USB_CC2: CONN1.B5 IC2.24
USB_N [USB]: CONN1.A7 CONN1.B7 R13.1
USB_P [USB]: CONN1.A6 CONN1.B6 R12.1
V_BATT: C20.1 IC2.19 S3.6 VBATT.TP
V_USB: C13.1 C14.1 IC2.21 L1.2 VBUS.TP
V_USB_OUT: C15.1 IC2.22 V_USB_OUT.TP
VBUS: C12.1 CONN1.A4_B9 CONN1.B4_A9 L1.1
VSYS: C2.1 C3.1 C4.1 C5.1 C6.1 C7.1 C8.1 C9.1 C10.1 C11.1 C21.1 C22.1 C23.1 C50.1 D1.1 D2.1 D3.1 D4.1 D5.1 D6.1 D7.1 D8.1 D9.1 D10.1 IC2.4 IC2.20 LED1.2 U15.6 VSYS.TP

## Tracks (layer width: path | path; a pad name or v marks a point on that pad's centre or on a via)
1.1V  (via drill 0.2)
  Top 0.152: C36.1 32.65,12.06 33.77,13.17 U2.50 | U2.39 31.51,18.77 30.42,18.77 30.13,18.48 29.93,18.48 29.68,18.23 v29.68,18.11 29.68,17.7 29.38,17.4 C40.1 | L2.1 33.54,9.57 v33.57,9.6 | U2.6 38.42,18.36 40.12,18.36 40.14,18.34 40.81,18.34 40.84,18.36 v43.2,18.36 C38.1 | U2.23 34.97,24.69 34.76,24.89 33.14,24.89 33.05,24.97 31.81,24.97 31.64,25.14 v31.64,25.24 C39.1
  Top 0.254: L2.1 32.65,9.61 C36.1
  Route15 0.152: v33.57,9.6 33.57,12.98 33.66,13.07 33.66,17.98 | 33.66,17.98 33.66,18.32 33.21,18.77 31.33,18.77 | v43.2,18.36 34.04,18.36 33.66,17.98 | 31.33,18.77 30.42,18.77 30.13,18.48 30.06,18.48 v29.68,18.11 | v31.64,25.24 31.64,22.96 31.79,22.81 31.79,19.23 31.33,18.77
1.8V  (via drill 0.2)
  Top 0.254: C43.1 59.22,35.3 | 59.22,35.3 MK1.1 | 59.22,35.3 59.13,35.39 U5.2 55.27,35.4 53.97,35.4 53.69,35.12 C45.2 55.06,33.22 v55.11,33.17 | IC2.1 17.64,40.61 18.38,41.34 L3.2 19.7,43.07 19.95,43.32 C24.1 1.8V.TP v22.6,44.95
  Route15 0.254: v55.11,33.17 55.11,43.79 53.91,44.98 22.62,44.98 v22.6,44.95
3.3V  (via drill 0.2)
  Top 0.152: v62.22,28.9 62.75,28.9 63.13,28.52 63.13,24.77 C48.1 64.13,23.77 C47.1 64.72,23.77 64.28,23.33 64.28,22.13 U9.3 | U2.49 33.37,13.46 33.16,13.26 | 33.16,13.26 32.76,12.85 C37.1 | 33.16,13.26 v33.13,13.29 | U2.53 34.94,15.69 34.94,14.66 34.69,14.41 34.69,13.28 35.02,12.95 36.46,12.95 36.67,12.75 36.67,12.01 C31.1 38.11,11.88 38.19,11.96 | C33.1 38.19,11.96 | 38.19,11.96 38.19,12.98 37.89,13.28 35.68,13.28 v35.65,13.31 35.37,13.59 U2.54 | IC1.8 C17.1 39.56,9.9 v39.46,9.8 | 28.78,14.75 28.69,14.65 C34.1 | U2.1 C29.1 42.87,15.54 v42.97,15.44 | U2.20 36.17,24.59 36.62,25.04 38.85,25.04 39.06,25.24 C28.1 39.99,26.14 v40.07,26.06 | U3.8 45.58,25.27 C51.2 41.32,25.27 v41.29,25.24 | R4.2 49.75,9.85 v49.77,9.88 | R1.1 48.4,6.14 v48.81,6.55 | U1.8 43.36,5.89 C1.1 41.59,6.35 41.59,6.45 41.26,6.78 v41.26,7.8 | U2.11 42.53,20.35 | C30.1 43.09,19.78 42.53,20.35 | 42.53,20.35 v42.53,20.21 | IC2.12 12.19,37.48 v11.62,38.05 11.55,38.12 C16.2 | R11.1 28.51,10.59 v27.55,10.59 | C27.1 28.97,19.15 29.91,19.15 | U2.38 29.91,19.15 | 29.91,19.15 v29.91,19.01 | 31.53,15.13 U2.45 U2.44 31.09,16.75 30.37,16.02 C32.1 | R23.2 50.54,22.91 v50.64,23.01 | U2.30 v31.26,22.58 30.9,22.22 28.18,22.22 27.65,22.76 C18.1
  Top 0.203: U6.8 v22.81,54.1 C19.1 | 28.69,14.65 v29.91,14.65 31.06,14.65 31.53,15.13 | C34.1 28.66,16 C32.1 | C46.1 51.17,35.12 v50.97,35.33 50.87,35.43 49.59,35.43 U5.19
  Top 0.254: J2.2 56.88,52.27 C26.1 56.48,51.2 v56.33,51.05 | R7.2 R6.2 28.18,58.46 v28.29,58.57 | U6.1 24.31,58.86 v24.43,58.98 | U6.12 25.1,55.94 25.92,55.11 25.92,54.58 v25.85,54.5 | U6.5 21.79,56.94 v21.38,57.35 | v19.78,38.96 18.36,38.96 IC2.32 | LS1.P C52.1 v33.37,63.34 32.14,63.34 31.99,63.19 D12.C
  Top 0.406: C16.2 10.65,40.03 3.3V.TP v10.61,42.11 10.61,42.82 10.89,43.1 12.26,43.1 L4.2 11.42,43.94 C25.1 | v22.39,16.1 22.47,16.03 C49.2 23.42,15.81 U15.1 23.42,12.78 22.47,11.83 U15.5
  Route15 0.254: v10.61,42.11 19.35,42.11 19.95,41.5 19.95,39.14 v19.78,38.96
  pour Route15: 19.55,61.41 29.1,61.41 33.16,65.48 42.31,65.48 47.79,59.99 52.87,59.99 56.94,55.93 57.34,55.93 60.19,53.08 60.19,42.52 62.63,40.08 62.63,20.37 57.34,15.08 49.62,7.36 49.62,5.94 34.59,5.94 23.82,5.94 19.75,10 15.69,14.07 15.69,18.34 11.01,23.01 10.4,23.01 7.97,23.01 6.34,24.63 6.34,45.77 12.23,51.66 12.23,54.1
!BOOT  (via drill 0.2)
  Top 0.152: S1.1 v44.95,2.78 S1.2 | v49.83,8.38 R5.2
  Route2 0.152: v44.95,2.78 47.3,2.78 49.83,5.3 v49.83,8.38
!ESP32_BOOT
  Top 0.152: U9.23 50.29,19.25 50,19.25 49.65,19.61 49.65,23.01 48.86,23.8 41.37,23.8 41.04,24.13 41.04,24.74 40.76,25.02 40.76,25.46 40.99,25.69 40.99,32.05 40.5,32.53 25.75,32.53 25.39,32.18 25.39,22.25 25.7,21.94 U2.31
!ESP32_RST  (via drill 0.2)
  Top 0.152: U2.29 32.54,22.61 32.54,23.11 32.36,23.3 31.98,23.3 31.97,23.29 28.21,23.29 27.78,23.72 27.78,31.49 28.36,32.08 30.95,32.08 31.14,31.88 v31.81,31.88 | U9.8 61.13,24.55 61.13,27.21 v61.11,27.23
  Bottom 0.152: v61.11,27.23 61.11,31.36 60.24,32.23 46.43,32.23 46.05,32.61 32.54,32.61 v31.81,31.88
!FLASH_CS  (via drill 0.2)
  Top 0.152: U1.1 46.11,5.66 R1.2 47.24,6.11 v47.82,6.69 | U2.2 42,16.75 42.33,17.08 45.39,17.08 v45.76,16.71
  Route2 0.152: v47.82,6.69 47.82,7.04 48.15,7.38 48.15,9.75 48.81,10.41 48.81,16.3 48.4,16.71 v45.76,16.71
!INT_NPM1300  (via drill 0.2)
  Top 0.152: U2.42 31.51,17.52 31,17.52 30.8,17.32 v30.19,17.32 | v12.23,39.67 12.24,39.68 IC2.8
  Bottom 0.152: v30.19,17.32 10.4,17.32 10,17.73 10,39.26 10.4,39.67 v12.23,39.67
!MEM_CS  (via drill 0.2)
  Top 0.152: U2.13 42.3,21.15
  Top 0.203: 42.3,21.15 v42.43,21.28 | v54.91,26.67 54.88,26.64 U3.2
  Route2 0.203: v42.43,21.28 47.67,21.28 47.87,21.08 47.87,17.62 47.97,17.52 v48,17.52
  Bottom 0.203: v48,17.52 48.63,17.52 48.65,17.54 54.95,17.54 55.62,18.21 55.62,25.96 v54.91,26.67
!QSPI_CS
  Top 0.152: R4.1 47.59,9.85 | 47.59,9.85 45.98,9.85 IC1.1 | R5.1 47.59,8.46 47.59,9.85 | U2.60 41.94,15.71 42.75,14.91 43.19,14.91 43.77,15.49 48.61,15.49 48.81,15.29 48.81,11.02 48.61,10.82 47.79,10.82 47.59,10.61 47.59,9.85
!RESET  (via drill 0.2)
  Top 0.152: S2.2 v27.68,4.2 S2.1 | v29.87,24.8 30.23,24.8 30.89,24.14 32.7,24.14 32.79,24.05 33.47,24.05 33.77,23.75 U2.26
  Route2 0.152: v27.68,4.2 36.1,4.2 36.41,4.52 36.41,7.16 36.82,7.57 37.63,7.57 37.84,7.77 37.84,20.37 37.63,20.57 29.51,20.57 29.3,20.77 29.3,20.88 29.43,21.01 29.43,21.45 29.3,21.58 29.3,24.23 v29.87,24.8
!RESET_NPM1300  (via drill 0.2)
  Top 0.203: IC2.7 14.59,39.73 14.59,40.54 14.32,40.81 13.92,40.81 13.1,41.63 12.09,41.63 v11.98,41.53 | v9.26,44.42 9.26,44.57 | 9.26,44.57 S4.4 | S4.3 9.25,44.56 9.26,44.57
  Route2 0.203: v11.98,41.53 11.6,41.53 11.17,41.96 11.17,42.34 9.26,44.25 v9.26,44.42
BUZZER_DRIVER  (via drill 0.2)
  Top 0.152: U2.14 41.42,21.55 v41.82,21.95 | v34.76,47.49 45.99,47.49
  Top 0.254: 45.99,47.49 46.62,47.49 47.69,48.56 47.69,51.71 R25.2
  Bottom 0.152: v41.82,21.95 41.41,21.54 34.31,21.54 34.18,21.66 34.18,27.56 34.2,27.58 34.2,30.2 33.82,30.58 31,30.58 30.67,30.91 30.67,46.91 31.26,47.49 v34.76,47.49
ESP32_CS  (via drill 0.2)
  Top 0.152: U2.33 28.71,21.15 28.66,21.19 25.02,21.19 24.83,21.38 24.83,32.69 25.24,33.09 45.16,33.09 45.54,32.71 45.98,32.71 46.24,32.97 46.57,32.97 46.65,32.89 v46.65,32.76 | U9.16 53.77,23.57 v52.47,23.57
  Route2 0.152: v46.65,32.76 51.65,32.76 51.93,32.48 51.93,28.34 51.7,28.11 51.7,27.66 52.57,26.8 52.57,23.57 v52.47,23.57
ESP32_HANDSHAKE  (via drill 0.2)
  Top 0.152: U9.6 62.02,23.21 v62.02,27.28 | v32.51,31.3 31.23,31.3 30.95,31.01 28.97,31.01 28.69,30.73 28.69,24.82 29.94,23.58 32.47,23.58 32.56,23.49 32.83,23.49 32.97,23.36 U2.28
  Route2 0.152: v62.02,27.28 62.02,28.35 61.69,28.68 61.69,41.83 61.41,42.11 34.38,42.11 33.62,41.35 33.62,31.78 33.31,31.47 32.68,31.47 v32.51,31.3
ESP32_MISO  (via drill 0.2)
  Top 0.152: U2.32 25.33,21.55 25.11,21.76 25.11,32.31 25.62,32.81 42.21,32.81 42.59,32.43 42.59,28.29 42.97,27.91 45.25,27.91 | 45.25,27.91 U3.6 | v55.11,27.89 62.27,27.89 62.58,27.58 62.58,23.85 62.83,23.59 62.83,22.91 U9.5 | v48.61,27.89 45.28,27.89 45.25,27.91
  Bottom 0.152: v55.11,27.89 52.99,27.89 52.46,27.35 52.02,27.35 51.48,27.89 v48.61,27.89
ESP32_MOSI
  Top 0.152: U2.35 28.72,20.35 28.43,20.64 24.59,20.64 24.25,20.98 24.25,33.4 24.63,33.78 46.78,33.78 47.18,33.37 47.18,31.89 47.06,31.76 47.06,31.32 47.18,31.2 47.18,29.51 46.85,29.18 | U3.5 45.75,29.1 46.78,29.1 46.85,29.18 | U9.21 51.86,19.91 51.86,23.03 51.65,23.23 51.65,28.85 51.32,29.18 46.85,29.18
ESP32_RX  (via drill 0.2)
  Top 0.152: U2.16 37.77,23.29 38.04,23.57 39.73,23.57 v39.91,23.38
  Top 0.203: U9.30 54.02,12.32 49.54,12.32 49.39,12.47 49.39,16.52 v49.79,16.91
  Route2 0.152: 41.06,24.69 40.36,24.69 39.91,24.24 v39.91,23.38
  Route2 0.203: v49.79,16.91 49.19,17.51 49.19,23.67 48.17,24.69 41.06,24.69
ESP32_SCK  (via drill 0.2)
  Top 0.152: U2.34 28.71,20.75 28.55,20.92 24.79,20.92 24.53,21.18 24.53,33.07 24.83,33.37 45.63,33.37 v45.76,33.24 | U3.3 52.26,27.91 | 52.26,27.91 v52.24,27.89 | U9.20 52.47,20.41 52.47,22.81 51.93,23.35 51.93,23.79 52.26,24.12 52.26,27.91
  Route2 0.152: v52.24,27.89 52.24,32.99 51.93,33.3 45.81,33.3 v45.76,33.24
ESP32_TX  (via drill 0.2)
  Top 0.152: U9.31 54.83,12.01 49.42,12.01 49.09,12.34 49.09,15.4 48.86,15.63 48.86,16.96 v48.88,16.99 | U2.17 37.37,23.86 37.58,24.08 v40.5,24.08
  Route2 0.152: v48.88,16.99 48.88,23.55 48.35,24.08 v40.5,24.08
GND  (via drill 0.2)
  Top 0.152: C36.2 30.7,11.38 v30.58,11.49 30.55,11.53 30.55,12.64 C37.2
  Top 0.254: IC2.28 16.14,36.98 IC2.33
  other vias: 59.58,30.93 32.55,16.91 44.95,16.18 32.15,28.5 49.62,24.84 58.08,37.56 58.49,42.64 30.24,22.75 50.64,13.33
  pour Top: -11.74,0.25 -11.74,58.57 17.31,87.63 75.43,87.63 85.18,77.87 85.18,-3.61 80.51,-8.28 -5.85,-8.28 -12.15,-1.98
  pour Route2: -27.59,6.96 -27.59,80.51 -15.81,92.3 87.82,92.3 112.82,67.31 112.82,-35.72 94.12,-54.41 32.96,-54.41 -27.59,6.14
  pour Bottom: -30.03,-36.12 -30.03,83.16 -13.57,99.62 122.98,99.62 147.77,74.82 147.77,-27.99 127.24,-48.52 -17.64,-48.52
IA611_IRQ  (via drill 0.2)
  Top 0.152: U2.9 38.43,19.57 38.93,19.57 39.17,19.81 v41.65,19.81 | v46.57,36.67 46.59,36.69 U5.17
  Route2 0.152: v41.65,19.81 39.3,19.81 39.18,19.94 39.18,35.84 40.02,36.67 v46.57,36.67
IA611_IRQ_LP
  Top 0.254: U5.4 53.42,36.69 52.87,37.23 52.87,43.74 53.89,44.75 62.83,44.75 63.24,44.34 63.24,36.62 62.82,36.21 MK1.6
LED0
  Top 0.254: IC2.25 19.85,35.48 20.26,35.07 20.26,34.92 20.54,34.64 22.85,34.64 23.3,35.09 LED1.3
LED1
  Top 0.254: LED1.4 21.01,35.59 20.62,35.98 IC2.26
LED2
  Top 0.254: IC2.27 20.35,36.48 20.62,36.75 20.62,37.51 21.15,38.05 23.13,38.05 23.31,37.87 23.31,36.5 LED1.1
LSM6_INT1  (via drill 0.2)
  Top 0.152: U2.19 36.57,24.28 37.05,24.76 39.53,24.76 40.6,25.84 40.6,31.29 39.87,32.03 33.11,32.03 v33.09,32 | v22.8,60.8 22.8,57.8 U6.4
  Route2 0.152: v33.09,32 32.48,32 32.27,32.2 32.27,60.93 31.69,61.52 23.26,61.52 22.8,61.06 v22.8,60.8
LSM6_INT2  (via drill 0.2)
  Top 0.152: U2.27 33.37,23.57 33.16,23.77 32.67,23.77 32.59,23.86 30.06,23.86 29.34,24.58 29.34,25.02 29.71,25.39 29.71,28.29 30.72,29.31 v31.33,29.31 | U6.9 23.31,54.4 23.94,53.77 v24.93,53.77
  Route2 0.152: v24.93,53.77 31.05,53.77 31.33,53.49 31.33,32.16 31.28,32.1 31.28,31.66 31.33,31.6 v31.33,29.31
N$1
  Top 0.152: U2.12 42.31,20.75 | 42.31,20.75 42.48,20.75 | R2.1 44.06,21.18 43.09,21.18 42.65,20.75 42.31,20.75
N$2
  Top 0.152: U2.46 32.17,14.67 31.66,14.17 30.22,14.17 29.61,13.56 29.61,13.36 29.45,13.2 C35.1 28.54,13.11 R11.2
N$3
  Top 0.254: IC2.18 14.64,33.09 14.16,32.61 R3.1
N$4
  Top 0.152: R2.2 D11.A
N$5
  Top 0.152: L2.2 29.84,9.57 29.51,9.9 29.51,12.04 29.91,12.44 29.91,13.28 30.39,13.76 32.65,13.76 32.97,14.07 U2.48
N$6
  Top 0.254: IC2.16 R10.2
N$7
  Top 0.254: IC2.17 14.14,34.03 13.96,33.85 11.75,33.85 11.55,34.06 R9.2
N$9
  Top 0.406: J1.2 12.94,21.99 18.29,21.99 S3.7
N$10
  Top 0.254: IC2.3 16.62,39.71 16.62,40.22 16.61,40.23 L3.1
N$11
  Top 0.152: R15.1 33.01,27.32 33.01,28.22 33.34,28.55 34.28,28.55 Y1.3 34.47,29.85 C41.1
N$12
  Top 0.152: C42.1 37.62,26.15 Y1.1 36.17,25.18 35.77,24.77 U2.21
N$13
  Top 0.152: U2.22 35.37,24.95 35.14,25.17 33.25,25.17 33.17,25.25 33.08,25.25 33.04,25.29 R15.2
N$14
  Top 0.254: IC2.5 15.64,40.68 14.77,41.55 14.34,41.55 14.08,41.81 L4.1
N$23
  Top 0.254: C44.1 60.29,33.55 MK1.2
N$24
  Top 0.254: U5.10 57.37,40.59 R22.2
N$25
  Top 0.152: U9.22 50.54,20.11 R23.1
N$26
  Top 0.254: LS1.N 36.74,56.39 | 36.74,56.39 32.45,56.39 31.99,56.84 D12.A | 36.74,56.39 36.74,57.6 38.09,58.95 46.75,58.95 47.34,58.37 Q2.3
N$27
  Top 0.254: R25.1 46.27,53.81 Q2.1
NPXL_1_IN
  Top 0.254: U15.4 21.52,9.02 22.32,8.23 22.32,4.95 21.5,4.14 20.64,4.14 D1.4
NPXL_1_OUT
  Top 0.254: 4.11,22.53 6.77,22.53 8.58,20.72 8.58,18.94 12.33,15.19 12.33,13.97 16.07,10.23 D1.2 15.92,9.01 | 4.11,22.53 3.98,22.53 | 4.11,22.53 2.62,24.01 D2.4
NPXL_2_OUT
  Top 0.254: 1.44,40.61 D3.4 1.62,38.76 2.12,38.25 5.73,38.25 6.75,37.23 6.75,31.54 5.73,30.53 D2.2
NPXL_3.3V  (via drill 0.2)
  Top 0.152: U2.40 31.51,18.32 31,18.32 30.81,18.13 v30.72,18.13 | v21.55,14.93 21.55,13.58 U15.3
  Bottom 0.152: v21.55,14.93 21.55,13.66 21.71,13.51 30.29,13.51 30.72,13.94 v30.72,18.13
NPXL_3_OUT  (via drill 0.2)
  Top 0.254: 4.41,46.1 4.41,45.77 | 4.41,45.77 D3.2 | 15.42,62.87 D4.4 14.06,61.67 13.66,61.26 v13.66,56.94 | v4.92,46.99 4.92,46.27 4.41,45.77
  Bottom 0.254: v4.92,46.99 13.66,55.72 v13.66,56.94
NPXL_4_OUT
  Top 0.254: D4.2 21.86,63.34 23.82,63.65 28.74,68.58 D5.4
NPXL_5_OUT
  Top 0.254: D5.2 38.24,65.88 47.59,65.88 D6.4
NPXL_6_OUT  (via drill 0.2)
  Top 0.254: D7.4 65.67,47.44 v65.67,49.42 | v55.31,59.18 54.88,60.6 D6.2
  Bottom 0.254: v65.67,49.42 55.92,59.18 v55.31,59.18
NPXL_7_OUT
  Top 0.254: D7.2 65.79,41.67 64.76,40.64 64.76,38.22 65.45,37.54 67.79,37.54 68.62,36.71 69.23,34.97 D8.4
NPXL_8_OUT  (via drill 0.2)
  Top 0.254: 65.97,26.7 D8.2 v65.07,27.28 | D9.4 56.73,9.19 v57.34,9.19
  Bottom 0.152: v65.07,27.28 65.07,19.3 57.34,11.58 v57.34,9.19
NPXL_9_OUT  (via drill 0.2)
  Top 0.152: D9.2 50.87,9.62 51.02,9.78
  Top 0.254: 51.02,9.78 v51.04,9.8 | D10.4 32.9,38.6 v32.96,38.66
  Route2 0.254: v43.73,43.33 33.52,43.33 32.91,42.72 32.91,38.71 v32.96,38.66
  Bottom 0.254: v51.04,9.8 63.85,22.6 63.85,42.92 63.44,43.33 v43.73,43.33
PDM_CLK  (via drill 0.2)
  Top 0.152: v50.03,18.34 49.75,18.06 47.78,18.06 47.35,17.63 43.17,17.63 42.75,18.06 41.27,18.06 41.17,17.95 U2.5 | v47.59,31.54 47.59,34.36 47.97,34.74 U5.20
  Bottom 0.152: v50.03,18.34 51.25,19.55 51.25,26.87 50.84,27.28 47.79,27.28 47.59,27.48 v47.59,31.54
PDM_CLK_LP
  Top 0.152: MK1.3 62.24,35.34 62.42,35.15 62.42,30.35 62.19,30.12 57.95,30.12 57.62,30.45 57.62,34.54 57.42,34.74 U5.1
PDM_SDO  (via drill 0.2)
  Top 0.152: U2.4 41.47,17.55 v41.49,17.52 | v56.73,30.73 53.41,30.73 52.67,31.47 52.67,35.73 52.36,36.04 U5.18
  Bottom 0.152: v41.49,17.52 46.98,17.52 48.12,16.38 55.59,16.38 56.94,17.73 56.94,30.53 v56.73,30.73
PDM_SDO_LP
  Top 0.152: MK1.5 60.29,36.65 60.19,36.75 58.03,36.75 57.32,36.04 U5.3
PVSS1
  Top 0.254: C23.2 R16.2 | C23.2 C24.2 | C23.2 17.48,44.91 17.48,41.11 17.14,40.77 IC2.2
PVSS2
  Top 0.152: C25.2 11.63,46.35 R14.2
  Top 0.254: IC2.6 15.14,40.5 14.47,41.17 14.07,41.17 13.19,42.04 13.19,44.74 C22.2 R14.2
QSPI_CLK  (via drill 0.2)
  Top 0.152: IC1.6 41.11,11.5 40.99,11.5 | 40.99,11.5 39.8,11.5 39.67,11.63 39.67,13.46 39.26,13.86 36.41,13.86 36.17,14.11 U2.56 | U1.6 43,6.9 42.42,7.48 v42.42,8.2 | v40.88,11.39 40.99,11.5
  Route2 0.152: v42.42,8.2 42.42,11.49 42.38,11.53 41.02,11.53 v40.88,11.39
SCL  (via drill 0.2)
  Top 0.152: J2.4 50.07,55.27 49.62,55.72 49.62,59.38 48.81,60.19 30.32,60.19 30.11,59.99 30.11,54.3 29.91,54.1 27.07,54.1 26.86,54.3 26.86,55.52 R7.1 | IC2.14 8.44,36.48 v8.42,36.47 | U2.37 29.22,19.55 29.2,19.57 26.96,19.57 26.95,19.55 v15.28,19.55
  Top 0.203: v8.42,36.47 7.38,36.47 7.1,36.75 7.1,37.38 5.81,38.68 5.81,48.48 6.44,49.12 30.04,49.12 30.67,49.75 30.67,53.34 29.91,54.1
  Top 0.254: U6.13 25.67,56.44 25.92,56.18 25.92,55.9 26.15,55.67 R7.1
  Route2 0.152: v8.42,36.47 8.25,36.29 8.25,33.55 8.57,33.23 14.75,33.23 15.28,32.69 v15.28,19.55
SDA  (via drill 0.2)
  Top 0.152: J2.3 58.56,55.36 58.56,55.93 58.16,56.33 50.43,56.33 49.9,56.87 49.9,59.5 48.89,60.51 30.1,60.51 | R6.1 27.02,60.15 27.39,60.51 29.91,60.51 30.1,60.51 | U2.36 28.36,19.95 v28.21,20.1 | IC2.13 9.22,36.98 v9.19,37.02 7.9,37.02 6.11,38.8 6.11,47.98 6.95,48.82 30.16,48.82 30.98,49.63 30.98,53.46 30.65,53.79 v30.65,56.13 | v30.32,60.73 30.1,60.51
  Top 0.254: U6.14 26.89,56.94 R6.1
  Route2 0.152: v28.21,20.1 26.16,20.1 25.9,20.37 25.9,31.57 25.09,32.38 19.75,32.38 18.63,33.51 8.9,33.51 8.68,33.73 8.68,35.97 8.96,36.25 8.96,36.79 v9.19,37.02 | v30.65,56.13 30.65,60.4 v30.32,60.73
SIO0  (via drill 0.2)
  Top 0.152: IC1.5 v41.09,12.3 40.42,12.3 40.07,12.65 40.07,13.46 39.26,14.27 37.02,14.27 36.57,14.73 U2.57 | U1.5 43.32,7.45 v43.32,8.18
  Route2 0.152: v43.32,8.18 43.25,8.25 43.25,11.96 42.91,12.3 v41.09,12.3
SIO1  (via drill 0.2)
  Top 0.152: U2.59 37.39,15.69 37.39,15.18 37.58,15 37.96,15 38.39,15.43 41.83,15.43 42.63,14.63 43.3,14.63 43.89,15.21 48.2,15.21 48.53,14.88 48.53,11.61 v48.27,11.35 48.01,11.1 47.68,11.1 47.28,10.7 IC1.2 | U1.2 45.97,6.5 46.87,6.5 47.31,6.94 47.31,7.29 v47.62,7.6
  Route2 0.152: v47.62,7.6 47.62,10.7 v48.27,11.35
SIO2  (via drill 0.2)
  Top 0.152: IC1.3 v46.78,11.5 47.47,11.5 47.67,11.5 48.2,12.04 48.2,14.53 47.79,14.93 44,14.93 43.42,14.35 42.51,14.35 41.71,15.15 38.51,15.15 38.07,14.72 37.45,14.72 36.99,15.18 36.99,15.69 U2.58 | U1.3 46.52,6.9 v46.78,7.16
  Route2 0.152: v46.78,7.16 v46.78,11.5
SIO3  (via drill 0.2)
  Top 0.152: U2.55 35.75,13.97 36.16,13.56 38.55,13.56 39.13,12.98 39.13,11.05 v39.48,10.7 v39.49,10.7 | v41.9,7.16 42.44,6.62 42.59,6.62 42.8,6.4 U1.7 | IC1.7 39.67,10.7 v39.49,10.7 | v39.48,10.71 v39.49,10.7
  Route2 0.152: v41.9,7.16 41.9,7.96 41.88,7.98 41.88,10.25 41.43,10.71 v39.48,10.71
SWCLK  (via drill 0.2)
  Top 0.152: U2.24 34.57,24.3 34.25,24.61 33.02,24.61 32.94,24.7 31.12,24.7 30.85,24.96 v30.85,28.19 | J4.1 10.98,53.11 v10.2,53.9
  Route2 0.152: v10.2,53.9 12.41,51.69 17.29,51.69 17.31,51.71 28.92,51.71 29.38,51.25 29.38,29.36 29.61,29.13 30.65,29.13 30.85,28.93 v30.85,28.19
SWDIO  (via drill 0.2)
  Top 0.152: U2.25 34.17,23.94 33.77,24.33 32.91,24.33 32.82,24.42 31,24.42 30.32,25.1 v30.32,27.07 | J4.3 9.14,52.4 v8.88,52.4
  Route2 0.152: v30.32,27.07 30.32,28.5 30.04,28.77 29.28,28.77 29,29.05 29,51.02 28.59,51.43 17.43,51.43 17.4,51.41 10.43,51.41 10.4,51.38 9.9,51.38 v8.88,52.4
U_N
  Top 0.152: U2.51 34.17,14.98 34.13,14.95 34.13,12.97 34,12.84 R13.2
U_P
  Top 0.152: U2.52 34.57,14.68 34.41,14.53 34.41,12.84 35.37,11.88 R12.2
UART_RX  (via drill 0.2)
  Top 0.152: U5.15 v46.78,37.99 | v42.86,19.27 42.62,19.27 42.1,18.75 40.83,18.75 40.7,18.61 40.26,18.61 40.12,18.75 U2.7
  Route2 0.152: v46.78,37.99 38.52,37.99 38.12,37.59 38.12,18.59 38.42,18.28 41.87,18.28 v42.86,19.27
UART_RX_LP
  Top 0.254: MK1.8 60.29,38.96 60.04,39.21 58.28,39.21 57.93,38.86 57.93,38.53 57.39,37.99 U5.6
UART_TX  (via drill 0.2)
  Top 0.152: U2.8 v40.48,19.15 | U5.16 46.15,37.34 v46.05,37.44
  Route2 0.152: v40.48,19.15 38.95,19.15 38.7,19.4 38.7,36.65 39.49,37.44 v46.05,37.44
UART_TX_LP
  Top 0.254: U5.5 53.81,37.34 53.64,37.51 53.64,42.85 54.07,43.28 60.9,43.28 61.31,42.86 MK1.9
USB_CC1  (via drill 0.2)
  Top 0.152: CONN1.A5 33.74,7.94 v33.71,7.97 | IC2.23 17.14,33.28 v17.73,32.69
  Route2 0.152: v33.71,7.97 25.7,7.97 25.34,8.33 25.34,31.34 24.86,31.82 18.28,31.82 17.73,32.37 v17.73,32.69
USB_CC2  (via drill 0.2)
  Top 0.152: CONN1.B5 36.74,8.13 v36.54,8.33 | IC2.24 17.64,33.45 17.87,33.23 17.95,33.23 18.51,32.66 v18.63,32.66
  Route2 0.152: v36.54,8.33 34.11,8.33 33.93,8.51 26.05,8.51 25.62,8.94 25.62,31.46 24.97,32.1 19.19,32.1 v18.63,32.66
USB_N
  Top 0.152: R13.1 34,9.96 34.56,9.41 34.56,8.28 34.48,8.05 34.24,7.82 CONN1.B7
  Top 0.254: CONN1.A7 35.24,5.68 35.12,5.56 34.53,5.56 34.24,5.85 CONN1.B7
USB_P
  Top 0.152: R12.1 35.4,9.96 34.84,9.41 34.84,8.58 34.92,8.51 | CONN1.A6 34.74,7.89 34.92,8.07 34.92,8.51 | CONN1.B6 35.74,7.91 35.51,7.91 34.92,8.51
V_BATT
  Top 0.254: 15.12,34.76 IC2.19 15.14,32.62 14.72,32.2 C20.1
  Top 0.406: C20.1 14.7,30.6 VBATT.TP 12.92,26.84 13.12,26.64 19.12,26.64 19.8,25.96 19.8,22.15 20.14,21.81 S3.6
V_USB  (via drill 0.2)
  Top 0.152: 17.47,31.49 17.27,31.49 v17.19,31.57
  Top 0.254: L1.2 25.85,6.42 | 25.85,6.42 C13.1 | C14.1 17.95,31.01 17.47,31.49 16.14,32.82 IC2.21 | VBUS.TP 25.77,6.35 25.85,6.42
  Top 0.406: VBUS.TP 24.22,7.97 v24.43,8.18
  Route15 0.406: v24.43,8.18 24.43,30.86 23.71,31.57 v17.19,31.57
V_USB_OUT
  Top 0.254: V_USB_OUT.TP 21.08,30.62 C15.1 19.4,31.72 19.22,31.9 17.69,31.9 16.63,32.97 16.63,34.77 IC2.22
VBUS
  Top 0.254: C12.1 L1.1 27.55,6.4 29.12,6.4 29.4,6.12 29.4,5.46 30.22,4.64 31.82,4.64 | CONN1.A4_B9 32.59,6.14 32.73,6.01 32.73,5.49 32.36,5.12 32.29,5.12 31.82,4.64 | CONN1.B4_A9 37.39,6.14 37.25,6.01 37.25,5.56 36.34,4.64 31.82,4.64
VSYS  (via drill 0.2)
  Top 0.254: 1.37,30.25 D2.1 1.04,30.84 C3.1 1.04,34.21 v0.85,34.39 | 2.96,46.21 D3.1 2.96,47.64 C4.1 arc-45 4.16,49.28 v4.71,49.83 | 20.81,65.88 D4.1 21.66,66.72 C5.1 23.87,65.57 v24.02,65.43 | v42.79,68.12 42.39,68.52 C6.1 41.12,68.56 D5.1 | 54.35,62.78 D6.1 C7.1 57.2,60.95 v57.95,60.19 | 68.24,41.78 D7.1 67.83,41.18 68.72,40.28 68.72,39.18 C8.1 68.85,37.97 v68.52,37.64 | 67.69,25.63 67.69,25.9 | 67.69,25.9 D8.1 | 66.46,23.87 C9.1 v67.14,24.82 67.69,25.9 | C10.1 50.12,3.88 50.09,3.92 v50.09,3.95 51.63,5.49 D9.1 | C2.1 13.12,8.99 v13.7,8.42 14.46,8.42 D1.1 14.99,7.56 | C21.1 16.47,31.77 16.2,32.05 | IC2.20 15.64,32.61 16.2,32.05 | D10.1 38.1,38.74 C11.1 v38.21,40.23 v38.22,40.23 | VSYS.TP 14.13,46.04 C22.1 15.48,44.95 | 15.48,44.95 C23.1 16.09,45.14 v16.09,46.58 | IC2.4 16.14,41.05 15.48,41.7 15.48,44.95 | 16.2,32.05 v16.14,31.99 | LED1.2 21.9,37.35 v21.89,37.36
  Top 0.406: C50.1 23.56,10.89 U15.6 23.42,7.01 23.18,6.78 23.18,5.31 v23,5.13
  Route15 0.254: v38.22,40.23 38.22,40.61 37.89,40.94 21.61,40.94 | 21.61,40.94 21.25,41.3 21.25,48.97 20.64,49.58 16.6,49.58 16.07,49.04 | 16.07,49.04 16.07,46.61 v16.09,46.58 | 16.07,49.04 15.28,49.83 v4.71,49.83 | v21.89,37.36 21.89,40.66 21.61,40.94
  Route15 0.406: v16.14,31.99 16.14,36.77 16.73,37.36 v21.89,37.36
  pour Route15 (rank 2): -15.2,-0.77 -15.2,75.84 -9.1,81.94 71.77,81.94 78.68,75.03 78.68,-7.27 68.93,-17.02 -9.1,-17.02 -15.4,-10.72 -15.4,-0.56

## Text on the board
tNames: RST | BOOT